# EAGLE board Main (EAGLE 7.7.0)

Size 100 x 80 mm. Coordinates in mm from the lower left corner, seen from the top.
Outline: 0,0 100,0 100,80 0,80 0,0
Copper layers (1*16): Top 0.035mm / dielectric 1.5mm / Bottom 0.035mm
Design rules "default": minimum track width 10mil, minimum drill 24mil, track to track 8mil, track to pad 8mil, pad to pad 8mil, via to via 8mil, smd to smd 8mil, copper to edge 40mil, drill to drill 8mil, minimum pad ring 10mil, minimum via ring 8mil, stop-mask expansion 4mil, vias tented up to drill 0mil, thermal gap 10mil

## Footprints (pad centres in the part's own frame; a part is rotated, then mirrored left to right if it is on the bottom)
C050-025X075 = drill 0.813 octagon: 1 -2.54,0; 2 2.54,0
C0805 = smd 1.3 x 1.5: 1 -0.95,0; 2 0.95,0
JST-PH-2-SMT-RA = smd 1 x 4.6: 1 1,-3.7; 2 -1,-3.7 | smd 1.6 x 3.4: NC1 -3.4,1.5; NC2 3.4,1.5
DRC-S-PVSON-N10 = smd 0.28 x 0.85: 1 -1,-1.475; 2 -0.5,-1.475; 3 0,-1.475; 4 0.5,-1.475; 5 1,-1.475; 6 1,1.475; 7 0.5,1.475; 8 0,1.475; 9 -0.5,1.475; 10 -1,1.475 | smd 2.4 x 1.65: TH 0,0
0309/12 = drill 0.813 octagon: 1 -6.35,0; 2 6.35,0
PTS645-SMD = smd 1.75 x 1.4: 1 -4.15,2.25; 2 4.15,2.25; 3 -4.15,-2.25; 4 4.15,-2.25
USB-MICRO-SMD = smd 1.4 x 0.4: D+1 2.7,0; D-1 2.7,0.65; GND1 2.7,-1.3; ID1 2.7,-0.65; VBUS1 2.7,1.3 | hole 0.85: 2.2,1.9; 2.2,-1.9
LGA-24 = smd 0.7 x 0.29: 1 -1.875,1.25; 2 -1.875,0.75; 3 -1.875,0.25; 4 -1.875,-0.25; 5 -1.875,-0.75; 6 -1.875,-1.25; 13 1.875,-1.25; 14 1.875,-0.75; 15 1.875,-0.25; 16 1.875,0.25; 17 1.875,0.75; 18 1.875,1.25 | smd 0.29 x 0.7: 7 -1.25,-1.875; 8 -0.75,-1.875; 9 -0.25,-1.875; 10 0.25,-1.875; 11 0.75,-1.875; 12 1.25,-1.875; 19 1.25,1.875; 20 0.75,1.875; 21 0.25,1.875; 22 -0.25,1.875; 23 -0.75,1.875; 24 -1.25,1.875
SOIC127P600X175-8N = smd 1.55 x 0.6: 1 -2.7,1.905; 2 -2.7,0.635; 3 -2.7,-0.635; 4 -2.7,-1.905; 5 2.7,-1.905; 6 2.7,-0.635; 7 2.7,0.635; 8 2.7,1.905
SOT23-5L = smd 0.55 x 1.2: 1 -0.95,-1.3; 2 0,-1.3; 3 0.95,-1.3; 4 0.95,1.3; 5 -0.95,1.3
TQFP44 = smd 1.5 x 0.5: 1 -5.8,4; 2 -5.8,3.2; 3 -5.8,2.4; 4 -5.8,1.6; 5 -5.8,0.8; 6 -5.8,0; 7 -5.8,-0.8; 8 -5.8,-1.6; 9 -5.8,-2.4; 10 -5.8,-3.2; 11 -5.8,-4; 23 5.8,-4; 24 5.8,-3.2; 25 5.8,-2.4; 26 5.8,-1.6; 27 5.8,-0.8; 28 5.8,0; 29 5.8,0.8; 30 5.8,1.6; 31 5.8,2.4; 32 5.8,3.2; 33 5.8,4 | smd 0.5 x 1.5: 12 -4,-5.8; 13 -3.2,-5.8; 14 -2.4,-5.8; 15 -1.6,-5.8; 16 -0.8,-5.8; 17 0,-5.8; 18 0.8,-5.8; 19 1.6,-5.8; 20 2.4,-5.8; 21 3.2,-5.8; 22 4,-5.8; 34 4,5.8; 35 3.2,5.8; 36 2.4,5.8; 37 1.6,5.8; 38 0.8,5.8; 39 0,5.8; 40 -0.8,5.8; 41 -1.6,5.8; 42 -2.4,5.8; 43 -3.2,5.8; 44 -4,5.8
HC49 = drill 0.813 pad 1.8: 1 -2.413,0; 2 2.413,0

## Placement (x,y rotation side)
C1  1µ  [C050-025X075]  -50.8,34.29 0 top  (outside the outline)
C2  1µ  [C050-025X075]  -16.51,44.45 0 top  (outside the outline)
C3  4.7µ  [C0805]  -35.56,43.18 0 top  (outside the outline)
C4  .22µ  [C0805]  -40.64,43.18 0 top  (outside the outline)
C5  2.2µ  [C0805]  -45.72,43.18 0 top  (outside the outline)
C6  100n  [C0805]  -24.13,43.18 0 top  (outside the outline)
C7  1µ  [C0805]  -30.48,52.07 0 top  (outside the outline)
C8  10u  [C0805]  -25.4,52.07 0 top  (outside the outline)
C9  2.2µ  [C0805]  -50.8,43.18 0 top  (outside the outline)
C10  100n  [C0805]  -30.48,43.18 0 top  (outside the outline)
C11  22p  [C0805]  -15.24,52.07 0 top  (outside the outline)
C12  22p  [C0805]  -20.32,52.07 0 top  (outside the outline)
CN2  [JST-PH-2-SMT-RA]  -40.64,7.62 0 top  (outside the outline)
IC1  BQ24022  [DRC-S-PVSON-N10]  -36.83,35.56 0 top  (outside the outline)
R1  4k'  [0309/12]  -40.64,49.53 0 top  (outside the outline)
R2  10k  [0309/12]  -20.32,57.15 0 top  (outside the outline)
S2  PTS645SM43SMTR92  [PTS645-SMD]  -40.64,25.4 0 top  (outside the outline)
U1  USB_In  [USB-MICRO-SMD]  -49.53,5.08 0 top  (outside the outline)
U3  LSM9DS0  [LGA-24]  -27.94,34.29 0 top  (outside the outline)
U$1  M25P10-AVMN6TP_TR  [SOIC127P600X175-8N]  -27.94,25.4 0 top  (outside the outline)
U$2  LP5907  [SOT23-5L]  -44.45,35.56 0 top  (outside the outline)
U$3  ATMEGA32U4-AU  [TQFP44]  -29.21,10.16 0 top  (outside the outline)
X1  8MHz  [HC49]  -19.05,35.56 0 top  (outside the outline)

## Library data of the parts
C1-C12 R1 R2 = rcl
CN2 U$2 U$3 = adafruit
IC1 = texas
S2 = switch-ck; MPN: PTS645SM43SMTR92 LFS; VENDOR: DIGIKEY; VENDOR_PN: CKN9112CT-ND
U1 = MicroUSB
U3 = LSM9DS0; AVAILABILITY: Warning; DESCRIPTION: iNEMO inertial module: 3D accelerometer, 3D gyroscope, 3D magnetometer; MF: STMicroelectronics; MP: LSM9DS0; PACKAGE: LGA-24 STMicroelectronics; PRICE: 4.67 USD
U$1 = SOIC127P600X175-8N
X1 = IQD-Frequency-Products; MPN: ATS080B; VENDOR: DIGIKEY; VENDOR_PN: CTX900-ND

## Nets
CLK: U3.21 U$1.6 U$3.9
D+: U1.D+1 U$3.4
D-: U1.D-1 U$3.3
GND: C1.2 C2.2 C3.1 C5.2 C6.2 C7.2 C8.2 C9.2 C10.2 C11.2 C12.2 CN2.2 IC1.5 IC1.7 IC1.8 IC1.9 R1.1 U1.GND1 U3.2 U3.3 U3.4 U3.5 U3.6 U$1.4 U$2.2 U$3.5 U$3.15 U$3.23 U$3.33 U$3.35 U$3.43
GYR_EN: U3.19 U$3.38
MEM_EN: U$1.1 U$3.40
MISO: U3.22 U3.23 U$1.2 U$3.11
MOSI: U3.24 U$1.5 U$3.10
N$1: C2.1 IC1.2 U1.VBUS1
N$2: C11.1 U$3.17 X1.1
N$3: R2.2 S2.3 S2.4 U$3.13
N$4: IC1.6 R1.2
N$5: C12.1 U$3.16 X1.2
N$6: C8.1 S2.1 S2.2
N$9: C3.2 U3.7
N$10: C4.2 U3.8
N$11: C4.1 U3.9
N$17: C1.1 CN2.1 IC1.10 U$2.1 U$2.3
VBUS1: U$3.7
VCC: C5.1 C6.1 C7.1 C9.1 C10.1 R2.1 U3.15 U3.16 U3.17 U3.18 U$1.3 U$1.7 U$1.8 U$2.5 U$3.6 U$3.14 U$3.24 U$3.34 U$3.44
XM_EN: U3.20 U$3.39

## Tracks (layer width: path | path; a pad name or v marks a point on that pad's centre or on a via)
CLK  (2 unrouted)
D+  (1 unrouted)
D-  (1 unrouted)
GND  (30 unrouted)
GYR_EN  (1 unrouted)
MEM_EN  (1 unrouted)
MISO  (3 unrouted)
MOSI  (2 unrouted)
N$1  (2 unrouted)
N$2  (2 unrouted)
N$3  (3 unrouted)
N$4  (1 unrouted)
N$5  (2 unrouted)
N$6  (2 unrouted)
N$9  (1 unrouted)
N$10  (1 unrouted)
N$11  (1 unrouted)
N$17  (4 unrouted)
VCC  (18 unrouted)
XM_EN  (1 unrouted)